# EAGLE board driverMotor (EAGLE 7.3.0)
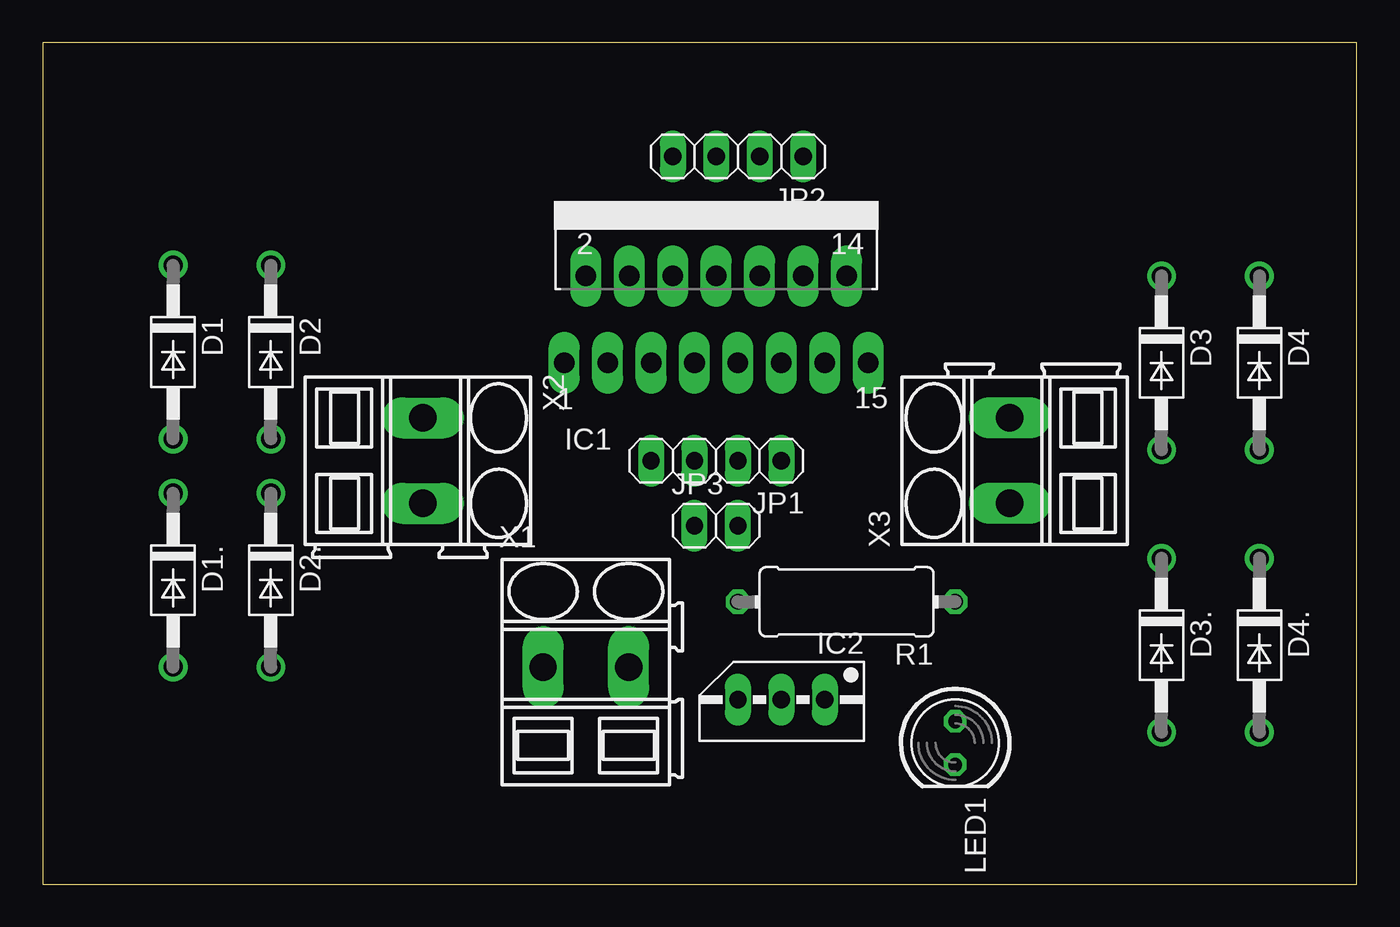
[diagram p0: board, top side]
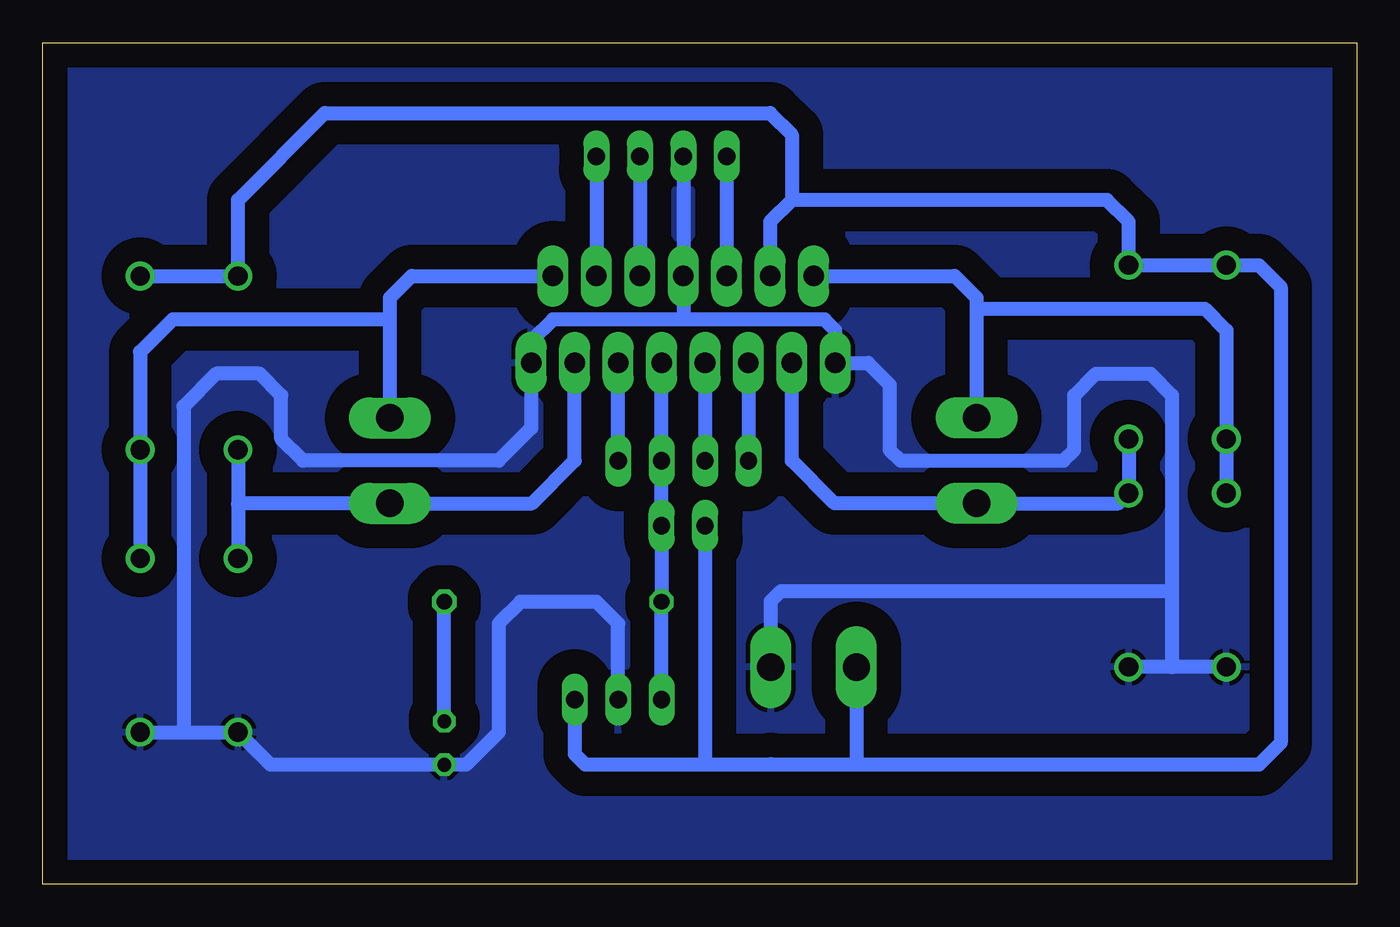
[diagram p1: board, bottom side, seen from below]

Size 76.81 x 49.2 mm. Coordinates in mm from the lower left corner, seen from the top.
Outline: 0,0 76.81,0 76.81,49.2 0,49.2 0,0
Copper layers (1*16): Top 0.035mm / dielectric 1.5mm / Bottom 0.035mm
Design rules "default": minimum track width 10mil, minimum drill 24mil, track to track 8mil, track to pad 8mil, pad to pad 8mil, via to via 8mil, smd to smd 8mil, copper to edge 40mil, drill to drill 8mil, minimum pad ring 10mil, minimum via ring 8mil, stop-mask expansion 4mil, vias tented up to drill 0mil, thermal gap 10mil

## Footprints (pad centres in the part's own frame; a part is rotated, then mirrored left to right if it is on the bottom)
DO41-10 = drill 1.118: A 5.08,0; C -5.08,0
MULTIWATT-15 = drill 1.2 long: 1 -8.89,-7.62; 2 -7.62,-2.54; 3 -6.35,-7.62; 4 -5.08,-2.54; 5 -3.81,-7.62; 6 -2.54,-2.54; 7 -1.27,-7.62; 8 0,-2.54; 9 1.27,-7.62; 10 2.54,-2.54; 11 3.81,-7.62; 12 5.08,-2.54; 13 6.35,-7.62; 14 7.62,-2.54; 15 8.89,-7.62
78MXXS = drill 1.016 long: GND 0,-2.54; IN -2.54,-2.54; OUT 2.54,-2.54
1X04 = drill 1.016 long: 1 -3.81,0; 2 -1.27,0; 3 1.27,0; 4 3.81,0
1X02 = drill 1.016 long: 1 -1.27,0; 2 1.27,0
LED5MM = drill 0.813 octagon: A -1.27,0; K 1.27,0
0411/12 = drill 0.914 octagon: 1 -6.35,0; 2 6.35,0
SMKDSP_1,5/2 = drill 1.6 pad 1.8 long: 1 -2.5,0; 2 2.5,0

## Placement (x,y rotation side)
D1  1N4004  [DO41-10]  7.62,31.12 270 top
D1.  1N4004  [DO41-10]  7.62,17.78 270 top
D2  1N4004  [DO41-10]  13.34,31.12 270 top
D2.  1N4004  [DO41-10]  13.34,17.78 270 top
D3  1N4004  [DO41-10]  65.41,30.48 270 top
D3.  1N4004  [DO41-10]  65.41,13.97 270 top
D4  1N4004  [DO41-10]  71.12,30.48 270 top
D4.  1N4004  [DO41-10]  71.12,13.97 270 top
IC1  L298  [MULTIWATT-15]  39.37,38.1 0 top
IC2  [78MXXS]  43.18,8.26 180 top
JP1  [1X04]  39.37,24.76 180 top
JP2  [1X04]  40.64,42.54 180 top
JP3  [1X02]  39.37,20.96 0 top
LED1  [LED5MM]  53.34,8.26 270 top
R1  [0411/12]  46.99,16.51 180 top
X1  SMKDSP_1,5/2  [SMKDSP_1,5/2]  31.75,12.7 0 top
X2  SMKDSP_1,5/2  [SMKDSP_1,5/2]  22.23,24.76 270 top
X3  SMKDSP_1,5/2  [SMKDSP_1,5/2]  56.52,24.76 90 top

## Library data of the parts
D1 D1. D2 D2. D3 D3. D4 D4. = diode
IC1 = st-microelectronics
IC2 = v-reg
JP1-JP3 = pinhead
LED1 = led
R1 = resistor
X1-X3 = con-phoenix-smkdsp; MF: FARNELL; MPN: 1733570; OC_FARNELL: 3041244; OC_NEWARK: 69C8588

## Nets
+5V: IC1.9 IC2.OUT JP1.2 JP3.2 R1.2
ENABLE_A: IC1.6 JP2.4
ENABLE_B: IC1.11 JP1.1
GND: D1..A D2..A D3..A D4..A IC1.1 IC1.8 IC1.15 IC2.GND JP2.3 LED1.K X1.2
INPUT1: IC1.5 JP1.4
INPUT2: IC1.7 JP1.3
INPUT3: IC1.10 JP2.2
INPUT4: IC1.12 JP2.1
LED: LED1.A R1.1
MOTOR1_1: D1..C D1.A IC1.2 X2.1
MOTOR1_2: D2..C D2.A IC1.3 X2.2
MOTOR2_1: D3..C D3.A IC1.13 X3.1
MOTOR2_2: D4..C D4.A IC1.14 X3.2
VS: D1.C D2.C D3.C D4.C IC1.4 IC2.IN JP3.1 X1.1

## Tracks (layer width: path | path; a pad name or v marks a point on that pad's centre or on a via)
+5V
  Bottom 0.813: IC1.9 JP1.2 JP3.2 R1.2 IC2.OUT
ENABLE_A
  Bottom 0.813: JP2.4 IC1.6
ENABLE_B
  Bottom 0.813: JP1.1 IC1.11
GND
  Bottom 0.813: 68.58,8.89 68.58,27.94 66.67,29.85 64.13,29.85 62.86,28.57 62.86,26.04 61.59,24.76 50.17,24.76 48.26,26.67 IC1.15 48.26,31.75 46.99,33.02 39.37,33.02 | D4..A 68.58,8.89 | 68.58,8.89 D3..A 63.5,6.99 LED1.K 52.07,6.99 50.17,8.89 50.17,15.24 48.89,16.51 44.45,16.51 43.18,15.24 IC2.GND | 10.8,17.15 10.8,28.57 12.07,29.85 15.24,29.85 16.51,28.57 16.51,25.4 17.14,24.76 26.67,24.76 27.31,25.4 27.31,29.21 28.57,30.48 IC1.1 30.48,32.38 31.11,33.02 39.37,33.02 | 10.8,17.15 10.8,12.7 | D1..A 10.8,12.7 | 10.8,12.7 D2..A | JP2.3 IC1.8 39.37,33.02 | X1.2 34.25,16.55 33.66,17.15 10.8,17.15
  pour Bottom (isolate 1.422): 1.27,47.63 1.27,1.27 75.56,1.27 75.56,47.63
INPUT1
  Bottom 0.813: IC1.5 JP1.4
INPUT2
  Bottom 0.813: IC1.7 JP1.3
INPUT3
  Bottom 0.813: JP2.2 IC1.10
INPUT4
  Bottom 0.813: JP2.1 IC1.12
LED
  Bottom 0.813: LED1.A R1.1
MOTOR1_1
  Bottom 0.813: D1..C D1.A 7.62,32.38 8.89,33.65 22.23,33.65 | IC1.2 23.5,35.56 22.23,34.29 22.23,33.65 | 22.23,33.65 X2.1
MOTOR1_2
  Bottom 0.813: D2.A D2..C 13.93,22.26 X2.2 30.52,22.26 33.02,24.76 IC1.3
MOTOR2_1
  Bottom 0.813: IC1.13 45.72,24.76 48.22,22.26 X3.1 65.36,22.26 65.41,22.23 | D3.A 65.41,22.23 | 65.41,22.23 D3..C
MOTOR2_2
  Bottom 0.813: X3.2 56.52,33.02 | 56.52,33.02 56.52,34.29 55.25,35.56 IC1.14 | D4..C D4.A 71.12,31.12 69.22,33.02 56.52,33.02
VS
  Bottom 0.813: 33.02,40.01 14.61,40.01 13.34,38.74 D2.C D1.C 5.71,36.2 4.45,34.93 4.45,8.26 5.71,6.99 29.21,6.99 | 33.02,40.01 34.29,38.74 IC1.4 | D4.C D3.C 65.41,40.01 60.33,45.09 34.29,45.09 33.02,43.82 33.02,40.01 | 29.21,6.99 34.29,6.99 | 34.29,6.99 38.1,6.99 | 38.1,6.99 45.08,6.99 45.72,7.62 IC2.IN | 34.25,7.02 34.29,6.99 | X1.1 29.25,7.02 29.21,6.99 | JP3.1 38.1,6.99